# Altium PCB balancing_robot_board.PcbDoc (part 2 of 2)
Units mm, origin at the board's own origin, x right, y up, seen from the top; angles counter-clockwise.
Board outline 65.02 x 38.99 mm, 2 copper layers (Top Layer, Bottom Layer); 76 components, 73 nets, 356 pads, 230 vias.
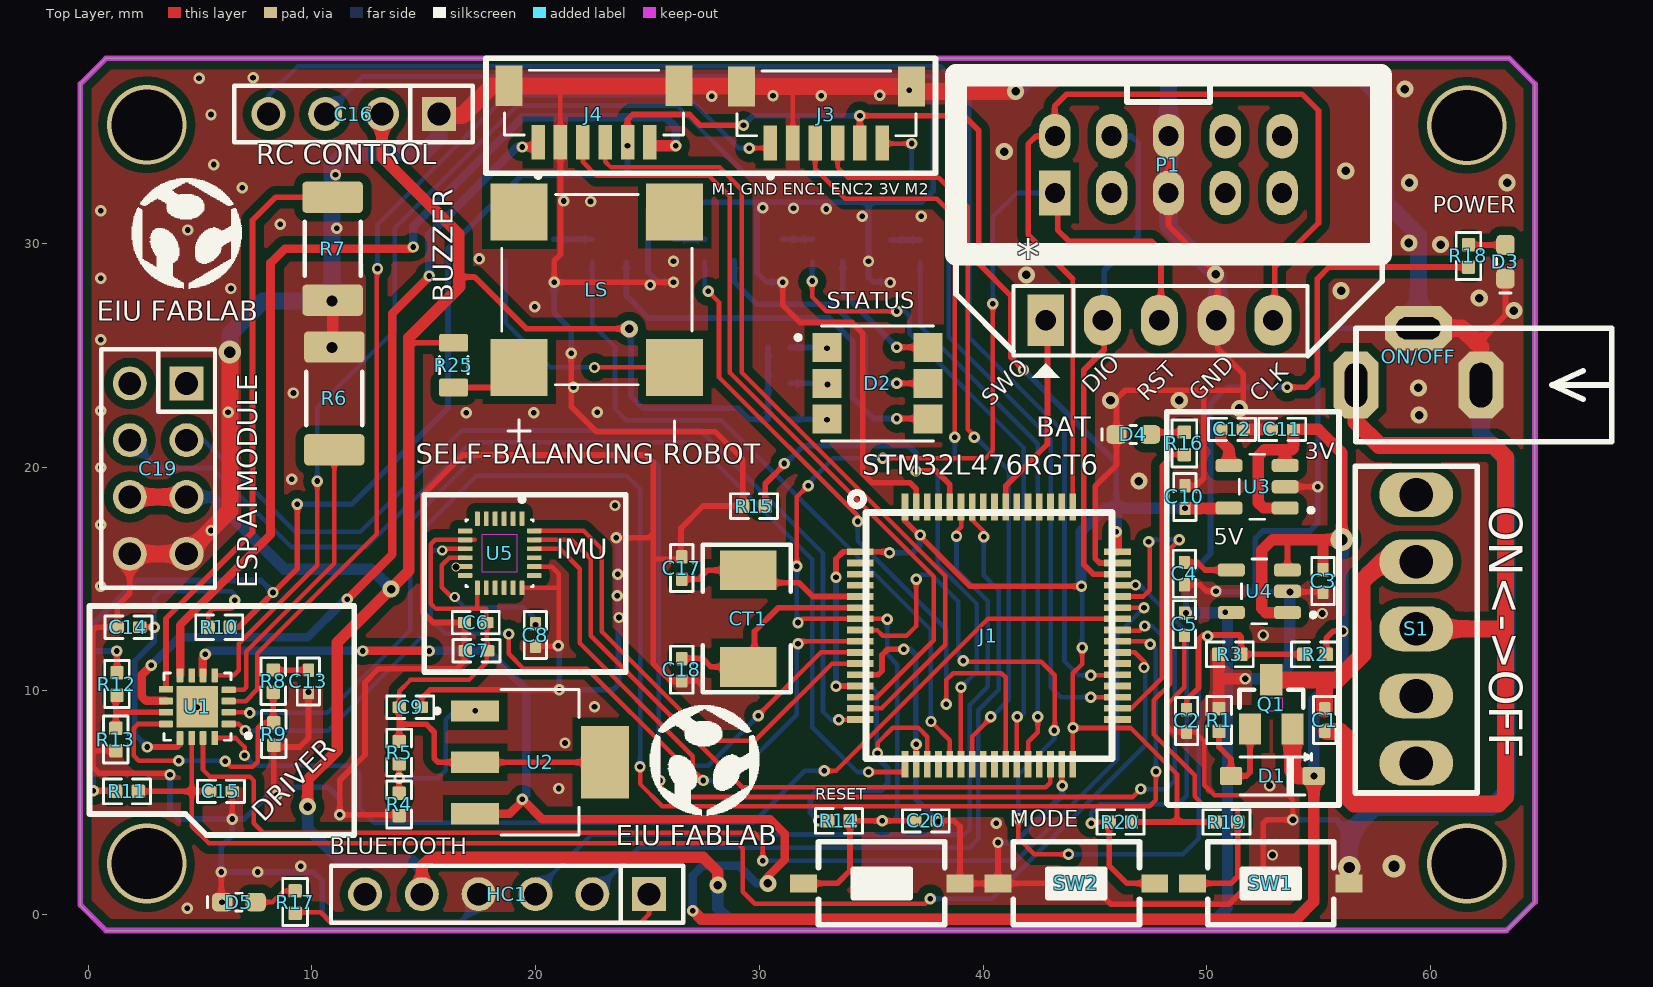
[diagram p0: Top Layer view]

## Via types
v1: diameter 0.508, hole 0.254, Top Layer to Bottom Layer, tented both sides, 184 vias
v2: diameter 0.762, hole 0.381, Top Layer to Bottom Layer, tented both sides, 24 vias
v3: diameter 0.508, hole 0.305, Top Layer to Bottom Layer, tented both sides, 9 vias
v4: diameter 1.016, hole 0.508, Top Layer to Bottom Layer, tented both sides, 6 vias
v5: diameter 3.556, hole 3.175, Top Layer to Bottom Layer, 4 vias
v6: diameter 0.457, hole 0.254, Top Layer to Bottom Layer, tented both sides, 2 vias
v7: diameter 0.406, hole 0.305, Top Layer to Bottom Layer, tented both sides, 1 vias

## Nets (pads, with @x,y where several pads share a name; then routed paths per layer and width w, separated by ;. In a path a pad name is that pad's centre, name@x,y a point inside that pad or via, vN(x,y) a via of type N, cw(c..) or ccw(c..) an arc to the next point about the centre after c; other vN are vias at no path point) (continued)
NetJ4_6: (continued)
  Bottom Layer w0.381: v1(14.529,29.845) 14.529,30.759 19.406,35.636 25.806,35.636 26.264,35.179 v1(26.264,34.366)
NetLS_N: LS.N STA.TR3.2 | length 11.2
  Top Layer w0.203: v1(22.631,24.46) 22.636,24.465 LS.N
  Bottom Layer w0.203: STA.TR3.2 18.661,26.45 20.65,24.46 v1(22.631,24.46)
NetLS_P: LS.P R25.1 R25.2 | length 3.3
  Top Layer w0.254: R25.2 18.355,23.562 LS.P
NetR4_1: R4.1 R5.2 U2.1 | length 7.3
  Top Layer w0.203: R4.1 v1(13.894,6.096) R5.2
  Bottom Layer w0.203: v1(13.894,6.096) 15.621,6.096 15.977,6.452 15.977,8.712 16.372,9.107 v1(17.293,9.107)
NetR6_1: R6.1 U1.4 | length 13.1
  Top Layer w0.203: U1.4 6.948,10.046 7.061,10.16 7.061,11.76 10.998,15.697 R6.1
NetR7_1: R7.1 U1.9 | length 26.6
  Top Layer w0.254: U1.9 3.477,13.23 7.341,17.094 7.341,31.039 8.371,32.069 R7.1
NetR8_2: R8.2 R9.2 U1.12 | length 12.1
  Top Layer w0.203: U1.12 2.222,8.521 2.032,8.331 2.032,7.112 2.261,6.883 v1(4.039,6.883) ; v1(6.121,6.858) 6.375,6.604 7.341,6.604 7.569,6.833 7.569,8.357 7.787,8.574 R9.2
  Top Layer w0.254: R8.2 8.267,8.6 R9.2
  Bottom Layer w0.203: v1(4.039,6.883) 5.842,6.883 v1@5.893,6.833
NetR12_1: R12.1 R13.2 U1.11 | length 3.8
  Top Layer w0.254: R13.2 1.232,9.068 ; R12.1 1.232,9.759 1.232,9.068 ; U1.11 1.253,9.046 1.232,9.068
NetR24_1: R24.1 STA.TR1.3 | length 1.3
  Bottom Layer w0.254: STA.TR1.3@35.873,30.16 37.178,30.16 R24.1@37.186,30.167
NetR26_1: R26.1 STA.TR3.3 | length 1.7
  Bottom Layer w0.254: STA.TR3.3 20.818,30.193 R26.1
NetR27_1: R27.1 STA.TR2.3 | length 1.3
  Bottom Layer w0.254: STA.TR2.3 32.352,30.185 R27.1
NetR28_1: R28.1 STA.TR4.3 | length 1.4
  Bottom Layer w0.254: STA.TR4.3 26.203,30.193 R28.1
VCC: C5.2 C16.2 C19.3 C19.6 HC1.5 R18.1 R21.1 R22.1 R23.1 U4.5 | length 161.2
  Top Layer w0.254: 14.58,25.527 14.614,25.562 16.332,25.562 16.383,25.613 ; 16.612,28.499 17.272,28.499 19.583,26.187 v2(24.181,26.187) ; v1(53.594,23.571) 54.432,23.571 54.938,24.077 54.938,28.42 55.464,28.947 R18.1
  Top Layer w0.508: v2(9.804,4.826) 9.804,6.02 11.125,7.341 11.125,12.167 14.326,15.367 14.326,25.781 16.612,28.067 16.612,28.499 ; C16.2 13.132,33.858 16.561,30.429 16.561,28.245 ; HC1.5 14.91,2.159 15.316,2.565 27.483,2.565 28.143,1.905 v2(28.143,1.321)
  Top Layer w0.762: C19.6 C19.3
  Bottom Layer w0.254: v2(24.181,26.187) 24.257,26.187 24.257,23.165 24.79,22.631 29.058,22.631 29.54,22.149 R23.1 R22.1 R21.1 ; v1(49.073,13.487) 49.073,15.037 50.165,16.129 50.165,22.835 50.902,23.571 v1(53.594,23.571)
  Bottom Layer w0.508: C19.3 5.537,18.669 8.763,15.443 12.649,15.443 v2(13.538,14.554) ; v2(9.804,4.826) 9.804,3.861 11.252,2.413 14.478,2.413 14.91,1.981 HC1.5 ; v2(28.143,1.321) 28.143,0.279 28.626,-0.203 50.419,-0.203 50.927,0.305 50.927,13.487 v1(49.073,13.487)
  other v1: 50.825,13.513
pads on no net: C1.0 C2.0 C3.0 C4.0 C5.0 C6.0 C7.0 C8.0 C9.0 C10.0 C11.0 C12.0 C13.0 C14.0 C15.0 C17.0 C18.0 C19.1 C19.8 C20.0 D1.0 HC1.6 J1.2 J1.3 J1.4 J1.20 J1.24 J1.25 J1.29 J1.33 J1.36 J1.38 J1.50 J1.51 J1.52 J1.53 J1.54 J1.57 J1.61 J1.62 LS.NC1 LS.NC2 P1.3 P1.7 P1.8 P1.9 P1.10 R1.0 R2.0 R3.0 R4.0 R5.0 R6.0 R7.0 R8.0 R9.0 R10.0 R11.0 R12.0 R13.0 R14.0 R15.0 R16.0 R17.0 R18.0 R19.0 R20.0 R21.0 R22.0 R23.0 R24.0 R25.0 R26.0 R27.0 R28.0 S1.3 S1.4 S1.5 U1.7 U5.1 U5.2 U5.3 U5.4 U5.5 U5.6 U5.7 U5.12 U5.14 U5.15 U5.16 U5.17 U5.19 U5.21
copper on no net:
  other v5: 2.616,2.286 61.62,2.286 61.62,35.281 2.616,35.306

## Polygon pours and split planes (outlines as drawn)
GND on Top Layer "Top Layer-GND" (solid, remove dead copper, pour order 12): 0.787,38.278 63.525,38.278 64.668,37.135 64.668,0.559 63.398,-0.711 0.787,-0.711 -0.356,0.432 -0.356,37.135
no net on Top Layer "Top Layer-No Net" (solid, pour order 0): 51.46,7.772
GND on Bottom Layer "Bottom Layer-GND" (solid, remove dead copper, pour order 10): 0.787,38.278 63.525,38.278 64.668,37.135 64.668,0.559 63.398,-0.711 0.787,-0.711 -0.356,0.432 -0.356,37.135

## Keep-outs
Keep-Out Layer:
  lines w0.254: -0.356,0.432 0.787,-0.711 63.398,-0.711 64.668,0.559 64.668,37.135 63.525,38.278 5.613,38.278 0.787,38.278 -0.356,37.135 -0.356,0.432

## Silkscreen, mask and mechanical layers (free items; w line width, h text height)
Top Overlay:
  drawing of 30 lines, arcs and shapes, not listed
  text "RC CONTROL" at 7.518,33.249 h1.52
  text "M1 GND ENC1 ENC2 3V M2" at 27.864,32.004 h0.89
  text "POWER" at 60.096,31.14 h1.27
  text "BUZZER" at 16.586,27.381 h1.52 r90
  text "STATUS" at 33.02,26.848 h1.27
  text "EIU FABLAB" at 0.381,26.264 h1.52
  text "DIO" at 45.034,23.089 h1.27 r45
  text "RST" at 47.498,22.733 h1.27 r45
  text "GND" at 49.809,22.733 h1.27 r45
  text "CLK" at 52.527,22.682 h1.27 r45
  text "SWO" at 40.538,22.504 h1.27 r45
  text "BAT" at 42.367,21.082 h1.52
  text "3V" at 54.381,20.117 h1.27
  text "SELF-BALANCING ROBOT" at 14.63,19.863 h1.52
  text "STM32L476RGT6" at 34.595,19.38 h1.52
  text "5V" at 50.317,16.281 h1.27
  text "IMU" at 20.93,15.621 h1.52
  text "ESP AI MODULE" at 7.849,14.58 h1.52 r90
  text "DRIVER" at 8.052,3.886 h1.52 r45
  text "MODE" at 41.199,3.683 h1.27
  text "EIU FABLAB" at 23.571,2.819 h1.52
  text "BLUETOOTH" at 10.795,2.464 h1.27
Mechanical 8:
  circle w0.254: c2.621,35.289 r1.75
  circle w0.254: c61.621,35.289 r1.75
  circle w0.254: c61.621,2.289 r1.75
  circle w0.254: c2.621,2.289 r1.75

## Text inside footprints (layer, text, board x,y; h text height)
S1: Top Overlay "ON<->OFF" at 62.624,18.285 h1.5 r270